# Allegro board B07_EX01.brd
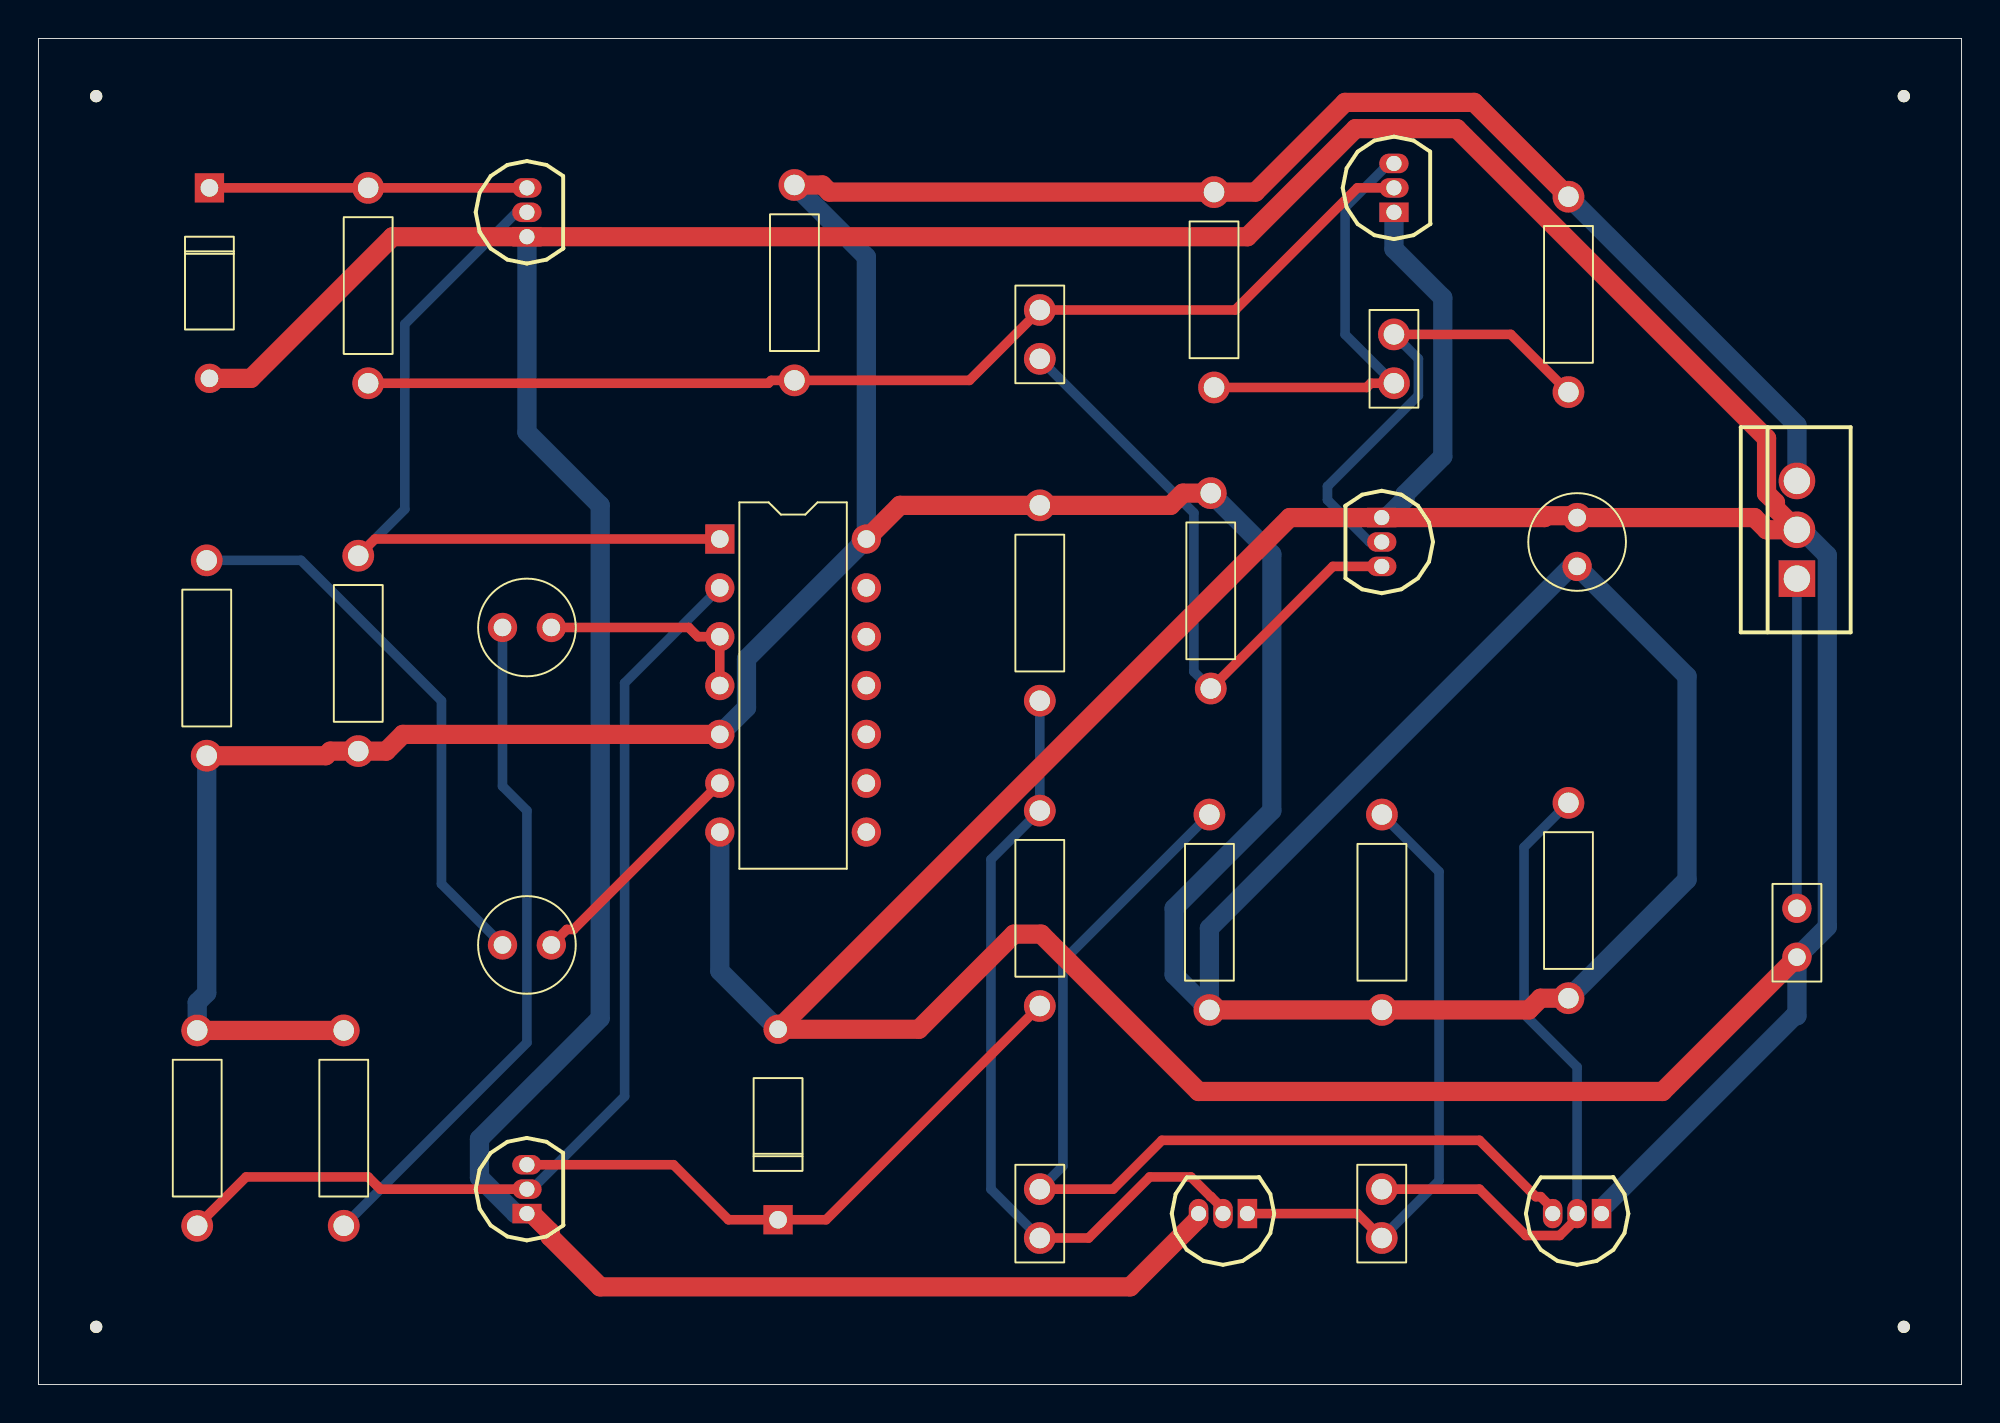
[diagram p0: board, top side]
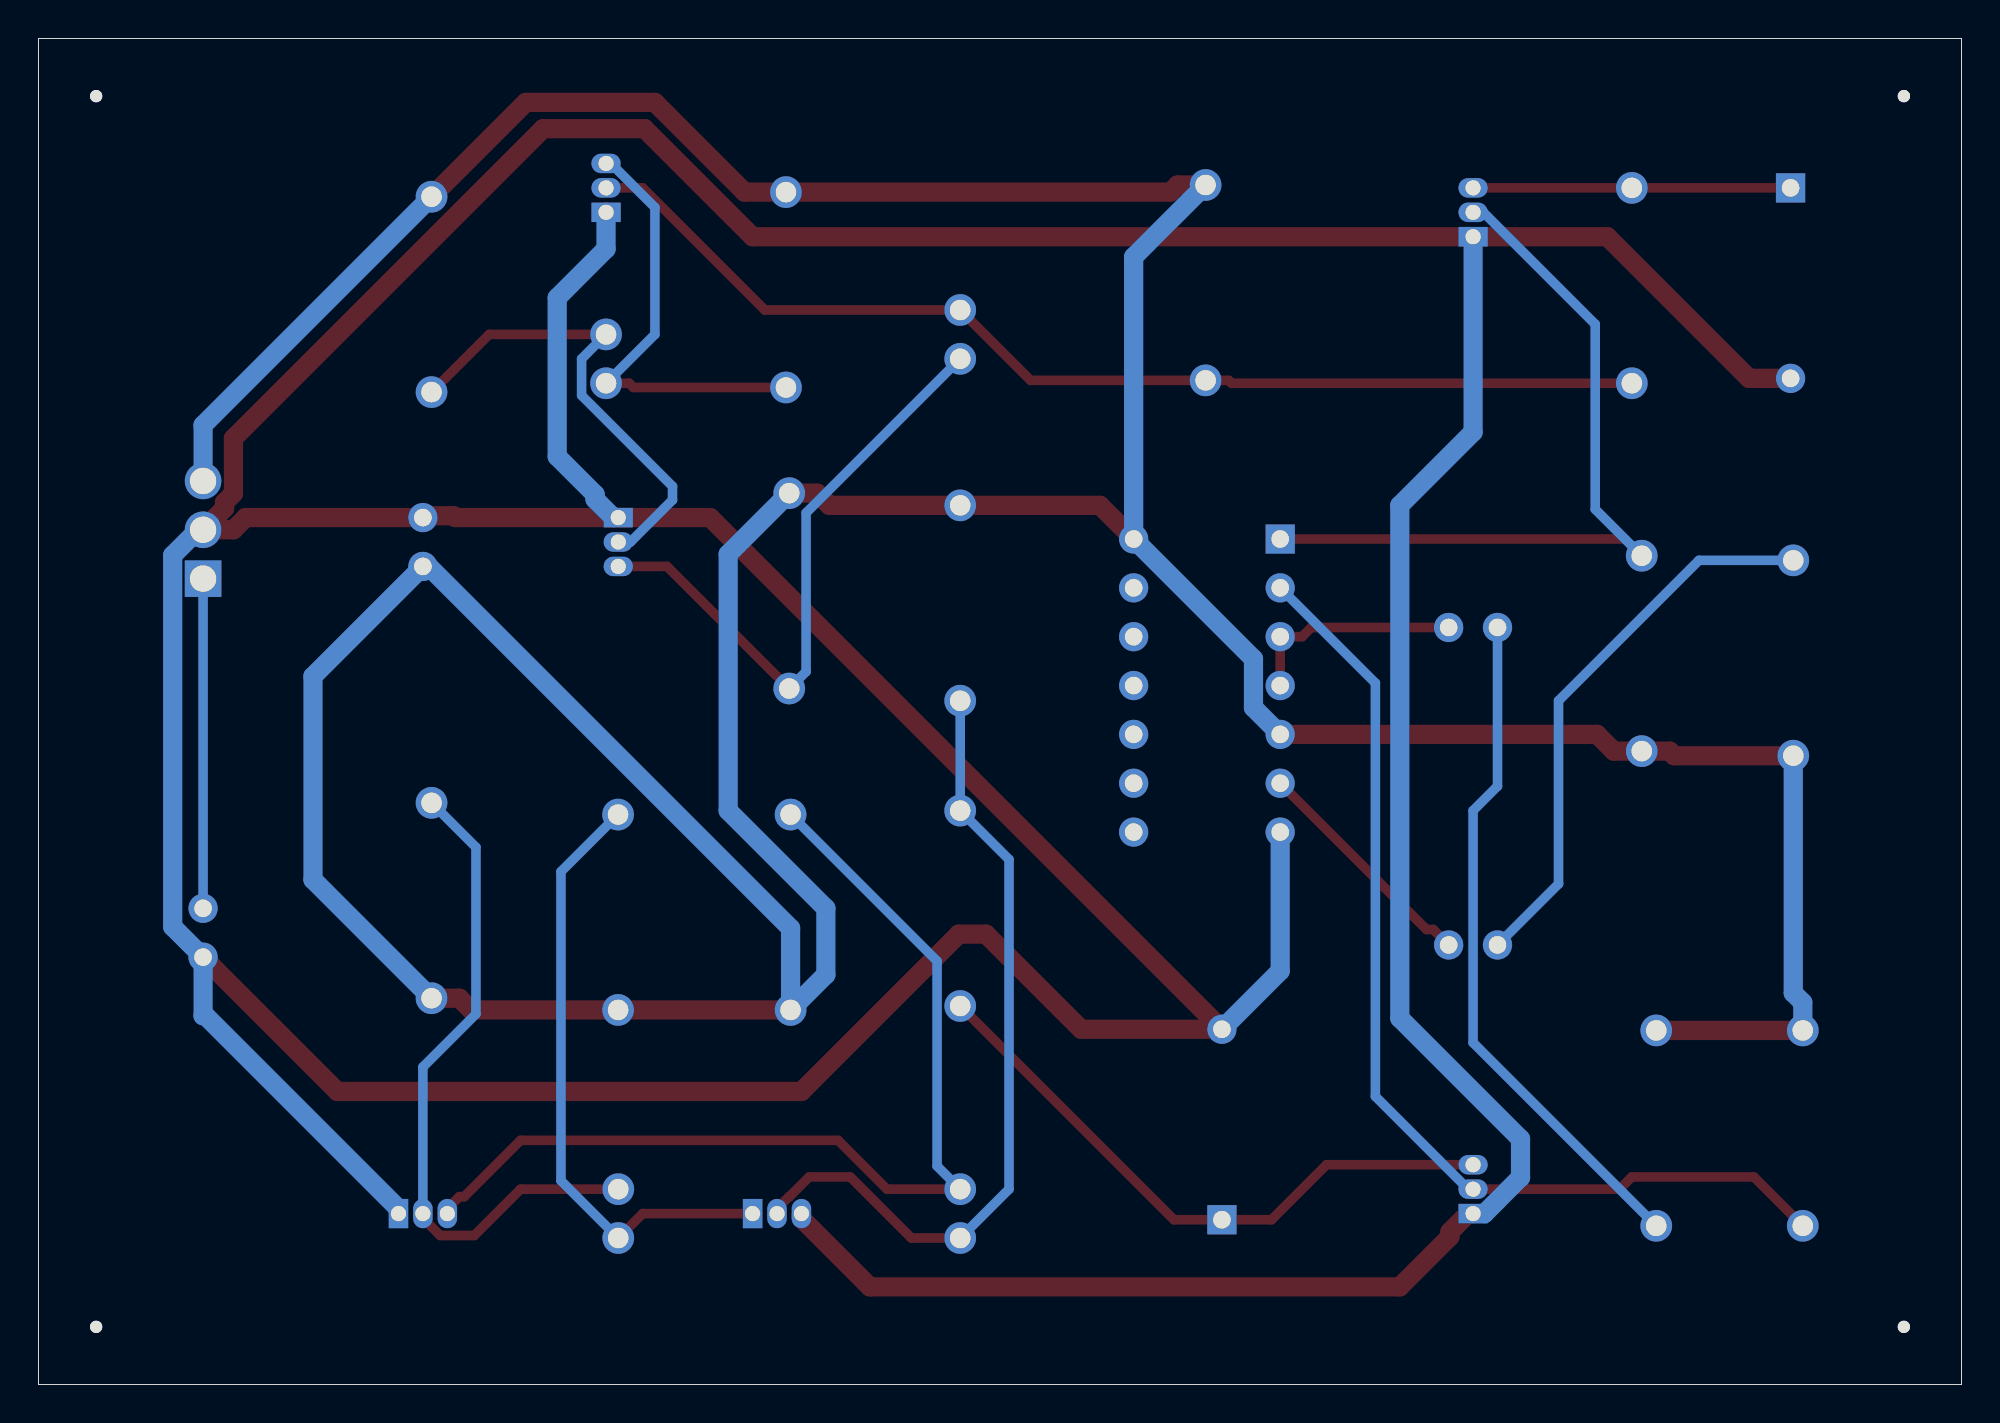
[diagram p1: board, bottom side, seen from below]

Outline 100 x 70 mm; copper layers: TOP, BOTTOM. Coordinates in mm from the lower left corner of the outline.
Outline path: 0,70 0,0 100,0 100,70 0,70

## Design rules (mm)
constraint set DEFAULT: min track width 0.5
nets with their own width: min track width 1; nets GND VCC

## Placement (name value [footprint] x y rotation side)
C1  0.1uF  [CAPCK05]  70.48 52.07 0 top
C2  0.1uF  [CAPCK05]  52.07 55.88 180 top
C3  0.1uF  [CAPCK05]  69.85 7.62 0 top
C4  0.1uF  [CAPCK05]  52.07 7.62 0 top
C5  2.2uF  [CAP196]  80.01 45.09 180 top
D1  LED  [CAP196]  24.13 39.37 270 top
D2  LED  [CAP196]  24.13 22.86 270 top
D3  1N4001  [DO41]  8.89 62.23 180 top
D4  1N4001  [DO41]  38.46 8.57 0 top
J1  CON2  [JUMPER2]  91.44 24.77 270 top
NOREF  -  [unnamed]  97 67 0 top
NOREF#2  -  [unnamed]  3 3 0 top
NOREF#3  -  [unnamed]  97 3 0 top
NOREF#4  -  [#2]  26.82 0 90 top
NOREF#5  -  [unnamed]  3 67 0 top
NOREF#6  -  [#2]  0 51 0 top
Q1  2SC373  [TO92]  25.4 59.69 90 top
Q2  2SC373  [TO92]  69.85 45.09 270 top
Q3  2SC373  [TO92]  70.48 60.96 90 top
Q4  NPN ECB  [TO92]  25.4 8.89 90 top
Q5  2SC373  [TO92]  81.28 8.89 180 top
Q6  2SC373  [TO92]  62.87 8.89 180 top
R1  1k  [RES400]  79.56 51.61 0 top
R2  25k  [RES400]  61.13 51.85 0 top
R3  25k  [RES400]  60.96 36.2 0 top
R4  1k  [RES400]  39.31 52.22 0 top
R5  3.3k  [RES400]  16.63 32.94 0 top
R6  470  [RES400]  15.88 18.41 180 top
R7  470  [RES400]  8.75 32.7 0 top
R8  10k  [RES400]  17.14 62.23 180 top
R9  R  [RES400]  79.56 20.09 0 top
R10  R  [RES400]  69.86 19.48 0 top
R11  R  [RES400]  60.89 19.48 0 top
R12  R  [RES400]  52.07 45.72 180 top
R13  3.3k  [RES400]  8.26 8.26 0 top
R14  R  [RES400]  52.07 29.84 180 top
U1  7486  [DIP14_3]  35.43 43.97 0 top
U2  LM7805/TO  [TO220AB]  91.44 41.91 90 top

## Library data of the parts
C1-C4 = CAP NP: Tolerance: ***; User Part Number: ***
C5 = CAP POL_0: Tolerance: ***; User Part Number: ***
D1 D2 = LED_0: Tolerance: ***; User Part Number: ***
D3 D4 = DIODE
J1 = CON2: User Part Number: ***
Q1-Q5 = NPN ECB
Q6 = NPN ECB_0
R1-R14 = R: Tolerance: ***; User Part Number: ***
U1 = 7486: Tolerance: ***; User Part Number: ***
U2 = LM7805/TO_2

## Footprints (pads in the part's own frame, mm; a bottom-side part is the same pattern mirrored in y, then rotated)
CAP196
  round 1.524 hole 0.914: 1(0,0) 2(0,2.54)
CAPCK05
  round 1.651 hole 1.067: 1(0,0) 2(0,2.54)
DIP14_3
  rect 1.524x1.524 hole 0.914: 1(0,0)
  round 1.524 hole 0.914: 2(0,-2.54) 3(0,-5.08) 4(0,-7.62) 5(0,-10.16) 6(0,-12.7) 7(0,-15.24) 8(7.62,-15.24) 9(7.62,-12.7) 10(7.62,-10.16) 11(7.62,-7.62) 12(7.62,-5.08) 13(7.62,-2.54) 14(7.62,0)
DO41
  rect 1.524x1.524 hole 0.914: 1(0,0)
  round 1.524 hole 0.914: 2(0,9.906)
JUMPER2
  round 1.524 hole 0.914: 1(0,0) 2(2.54,0)
RES400
  round 1.651 hole 1.067: 1(0,0) 2(0,10.16)
TO92
  rect 1.016x1.524 hole 0.787: 1(0,0)
  oval 1.016x1.524 hole 0.787: 2(1.27,0) 3(2.54,0)
TO220AB
  rect 1.905x1.905 hole 1.372: 1(0,0)
  round 1.905 hole 1.372: 2(2.54,0) 3(5.08,0)
unnamed
  round 0.635 hole 3 unplated: (0,0)

## Nets
GND: C5.1(2) D3.2 D4.2 J1.2 Q1.1(E) Q2.1(E) Q3.1(E) Q4.1(E) Q5.1(E) Q6.3(E) U1.7 U2.2
VCC: C5.2 R1.2 R2.2 R3.2 R4.2 R5.1 R6.1 R7.1 R9.1 R10.1 R11.1 R12.1 R13.2 U1.5 U1.14 U2.3
N00909: D2.1 R7.2
N00913: D1.1 R6.2
N00917: Q1.2 R5.2 U1.1
N00967: D2.2(CATHODE) U1.6
N01039: D1.2(CATHODE) U1.3 U1.4
N01090: Q4.2 R13.1 U1.2
N01119: D3.1(K) Q1.3 R8.1
N01193: C2.1 Q3.2 R4.1 R8.2
N01323: C1.2 Q2.2 R1.1
N01371: C2.2 Q2.3 R3.1
N01393: C1.1 Q3.3 R2.1
N01711: C4.1 Q6.2 R12.2 R14.1
N01718: C4.2 Q5.3 R11.2
N01731: C3.1 Q6.1 R10.2
N01738: C3.2 Q5.2 R9.2
N01834: D4.1(K) Q4.3 R14.2
N01889: J1.1 U2.1(VIN)

Pads without a net: U1 8 9 10 11 12 13

## Routing (per net, layer and track width the routed paths; a pad name or vN(x,y) marks a point on that pad's centre or on a via; arc(x,y) is an arc through that point)
GND: length 389.8
  TOP w1: 79.8,45.18 78.41,45.18 78.32,45.09 Q2.1 65.07,45.09 D4.2 45.78,18.48 50.73,23.42 52.14,23.42 60.33,15.24 84.45,15.24 J1.2 ; Q4.1 25.65,8.89 26.61,7.94 26.61,7.68 29.21,5.08 56.77,5.08 60.33,8.64 Q6.3 ; C5.1 89.23,45.09 89.86,44.45 U2.2 90.32,45.57 90.32,45.87 89.86,46.34 89.86,49.2 73.76,65.31 68.48,65.31 62.87,59.69 Q1.1 18.41,59.69 11.05,52.32 D3.2
  BOTTOM w1: Q3.1 70.48,59.05 73.03,56.52 73.03,48.26 71.06,46.29 71.06,46.04 70.1,45.09 Q2.1 ; Q1.1 25.4,49.53 29.21,45.72 29.21,19.05 22.93,12.77 22.93,10.77 24.81,8.89 Q4.1 ; U2.2 91.69,44.45 93.02,43.12 93.02,23.8 J1.2 91.44,19.18 91.31,19.18 81.28,9.14 Q5.1 ; U1.7 35.43,21.51 D4.2
VCC: length 273.8
  TOP w1: R7.1 14.94,32.7 15.18,32.94 R5.1 18.08,32.94 18.95,33.81 U1.5 ; R1.2 74.66,66.67 67.94,66.67 63.28,62.01 R2.2 41.13,62.01 40.76,62.38 R4.2 ; R6.1 R13.2 ; R11.1 R10.1 77.5,19.48 78.11,20.09 R9.1 ; R3.2 59.51,46.35 58.87,45.72 R12.1 44.8,45.72 U1.14
  BOTTOM w1: R13.2 8.26,19.87 8.75,20.36 R7.1 ; R4.2 43.05,58.64 U1.14 36.82,37.74 36.82,35.2 U1.5 ; R1.2 91.44,49.89 U2.3 ; 79.8,42.64 60.89,23.73 R11.1 59.05,21.32 59.05,24.77 64.14,29.84 64.14,43.18 R3.2 ; R9.1 85.72,26.25 85.72,36.83 C5.2
N00909: length 29.2
  BOTTOM w0.5: R7.2 13.65,42.86 20.95,35.56 20.95,26.04 D2.1
N00913: length 35.6
  BOTTOM w0.5: 15.88,8.26 25.4,17.78 25.4,29.84 24.13,31.11 D1.1
N00917: length 41
  TOP w0.5: U1.1 17.5,43.97 R5.2
  BOTTOM w0.5: R5.2 19.05,45.52 19.05,55.14 24.87,60.96 Q1.2
N00967: length 12.2
  TOP w0.5: U1.6 27.83,23.67 27.48,23.67 D2.2
N01039: length 11.5
  TOP w0.5: D1.2 33.81,39.37 34.29,38.89 U1.3 U1.4
N01090: length 54
  TOP w0.5: Q4.2 17.78,10.16 17.14,10.79 10.79,10.79 R13.1
  BOTTOM w0.5: Q4.2 25.65,10.16 30.48,14.99 30.48,36.48 U1.2
N01119: length 16.5
  TOP w0.5: D3.1 R8.1 Q1.3
N01193: length 57.5
  TOP w0.5: R8.2 37.96,52.07 38.11,52.22 R4.1 48.41,52.22 C2.1 62.23,55.88 68.58,62.23 Q3.2
N01323: length 25.1
  TOP w0.5: C1.2 76.56,54.61 R1.1
  BOTTOM w0.5: C1.2 71.75,53.34 71.75,51.44 67.03,46.71 67.03,46 69.22,43.81 Q2.2
N01371: length 32.3
  TOP w0.5: R3.1 67.31,42.55 Q2.3
  BOTTOM w0.5: C2.2 60.08,45.33 60.08,37.07 R3.1
N01393: length 23.1
  TOP w0.5: R2.1 69.06,51.85 69.28,52.07 C1.1
  BOTTOM w0.5: Q3.3 70.23,63.5 67.94,61.21 67.94,54.61 C1.1
N01711: length 41.8
  TOP w0.5: C4.1 54.61,7.62 57.78,10.79 59.93,10.79 60.95,9.77 60.97,9.77 61.59,9.14 Q6.2
  BOTTOM w0.5: C4.1 49.53,10.16 49.53,27.3 R14.1 R12.2
N01718: length 52.6
  TOP w0.5: Q5.3 78.74,9.14 78.11,9.77 77.86,9.77 74.93,12.7 58.42,12.7 55.88,10.16 C4.2
  BOTTOM w0.5: R11.2 53.27,22.02 53.27,11.36 C4.2
N01731: length 32
  TOP w0.5: Q6.1 68.58,8.89 C3.1
  BOTTOM w0.5: C3.1 72.83,10.6 72.83,26.67 R10.2
N01738: length 35.2
  TOP w0.5: C3.2 74.93,10.16 77.34,7.75 79.11,7.75 80.01,8.65 Q5.2
  BOTTOM w0.5: R9.2 77.25,27.94 77.25,19.27 80.01,16.51 Q5.2
N01834: length 32.5
  TOP w0.5: R14.2 40.95,8.57 D4.1 35.88,8.57 33.02,11.43 Q4.3
N01889: length 17.1
  BOTTOM w0.5: U2.1 J1.1

## Text on the board
USER_PART_NUM_TOP: FIGURE | FINISHED_SIZE | 0.7874 | 0.9144 | 1.0668 | 1.3716 | 3.0 | DRILL CHART: TOP to BOTTOM | ALL UNITS ARE IN MILLIMETERS | PLATED | NON-PLATED | QTY | 18 | 26 | 36 | 3 | 4
